# Altium PCB LM_001_Rev_F.PcbDoc (part 1 of 2)
Units mm, origin at the board's own origin, x right, y up, seen from the top; angles counter-clockwise.
Board outline 67 x 180 mm, 4 copper layers (Top Layer, +5V, Signal Layer 1, Bottom Layer), stack 0.778 mm thick; 116 components, 101 nets, 360 pads, 22 vias.
Unrouted connection lines stored in the file: 51.
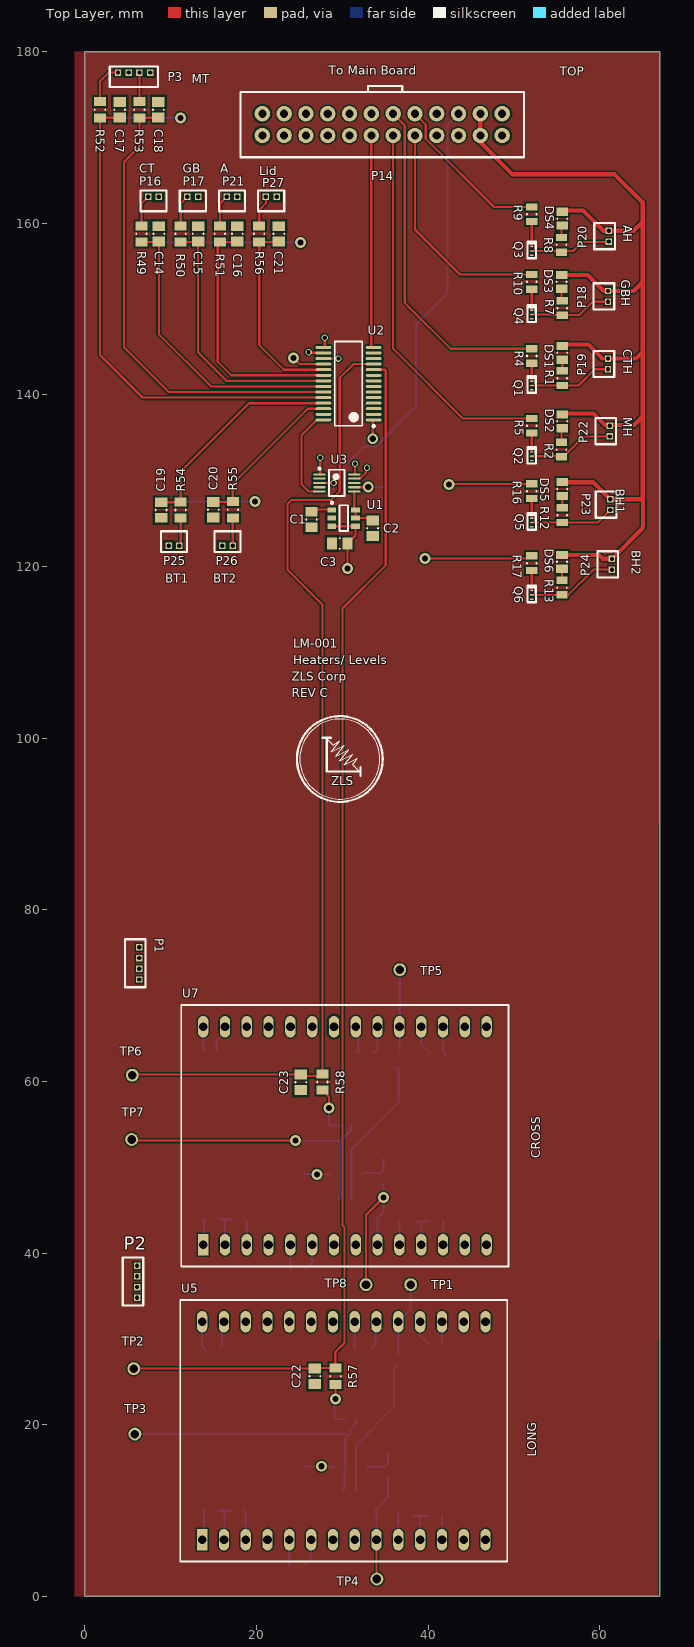
[diagram p0: Top Layer view]
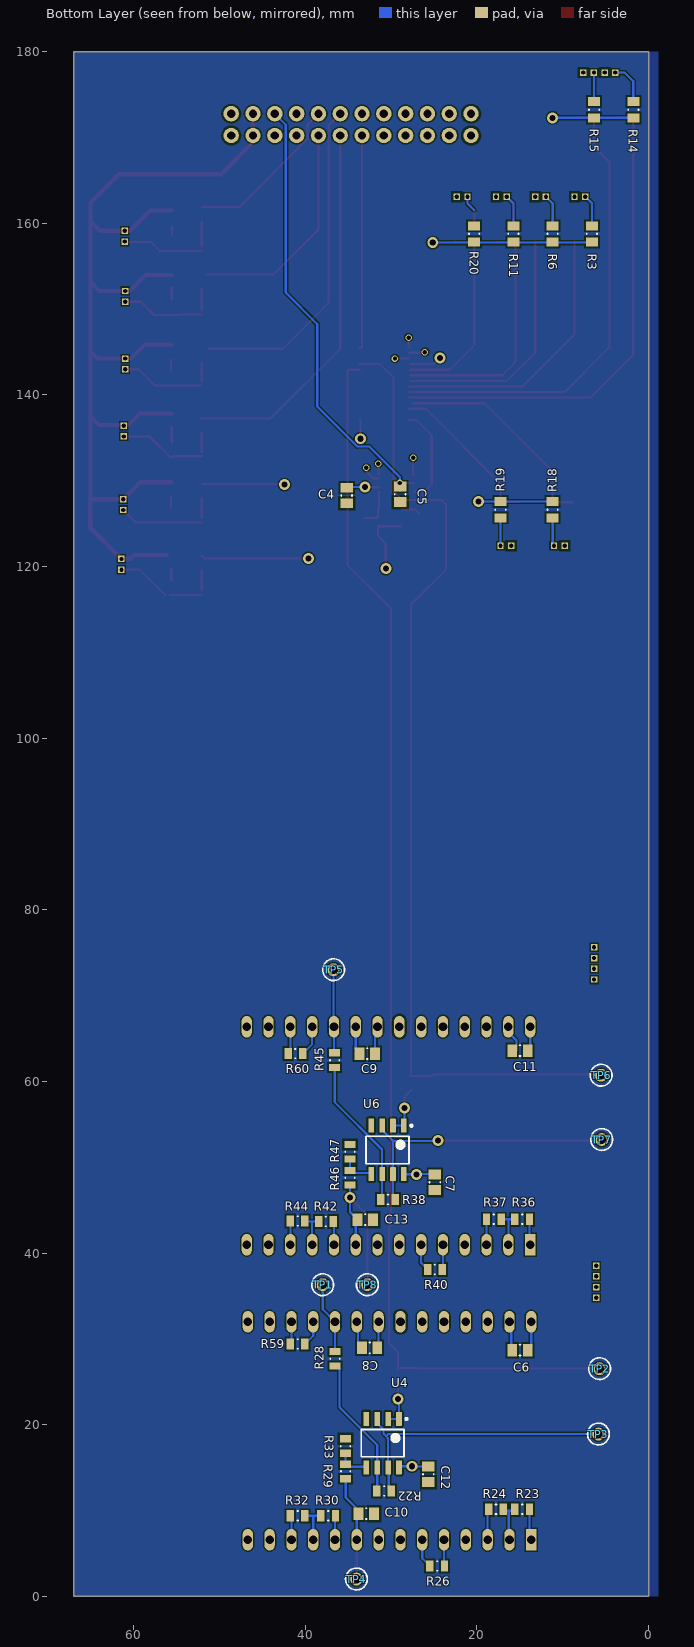
[diagram p1: Bottom Layer view, seen from below]
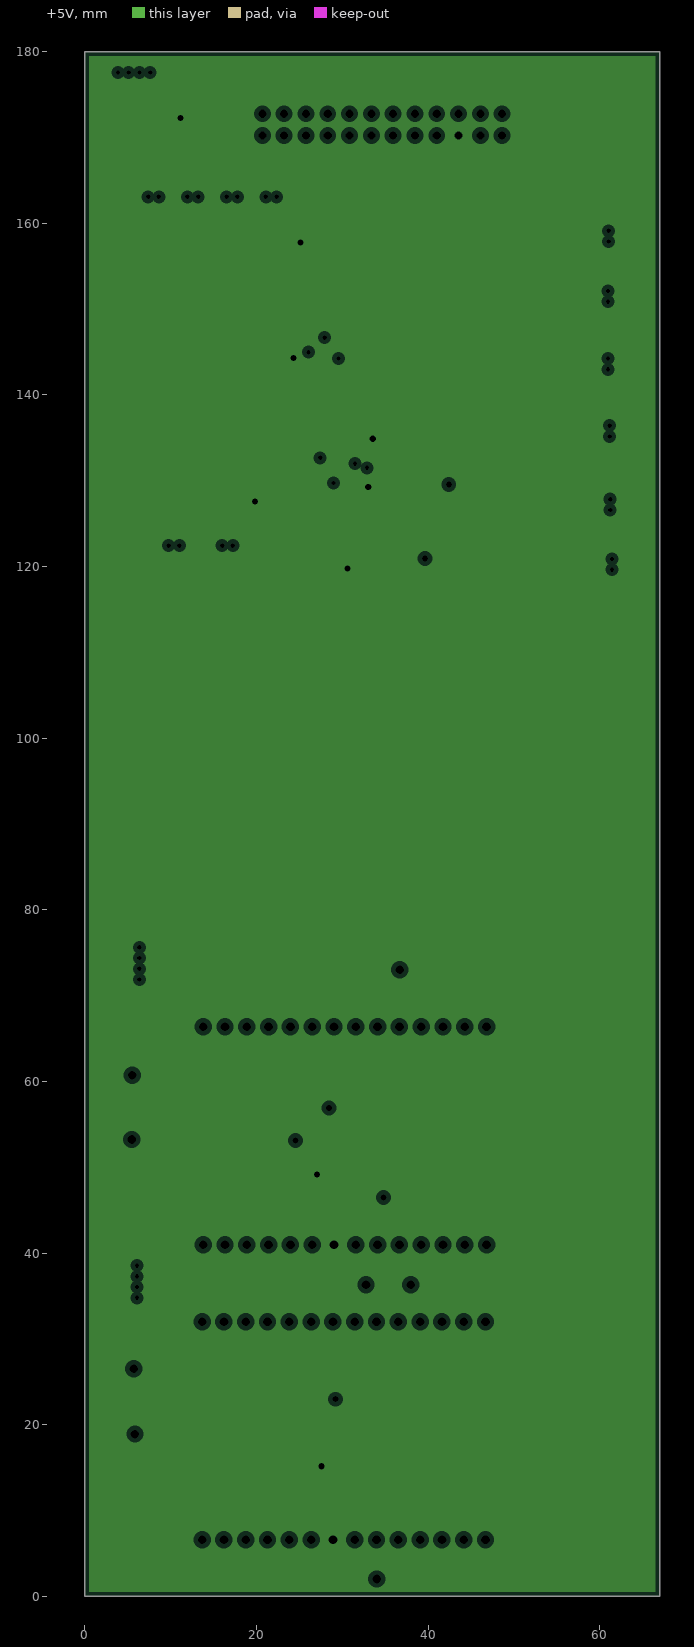
[diagram p2: +5V, clearances drawn from the general rule]
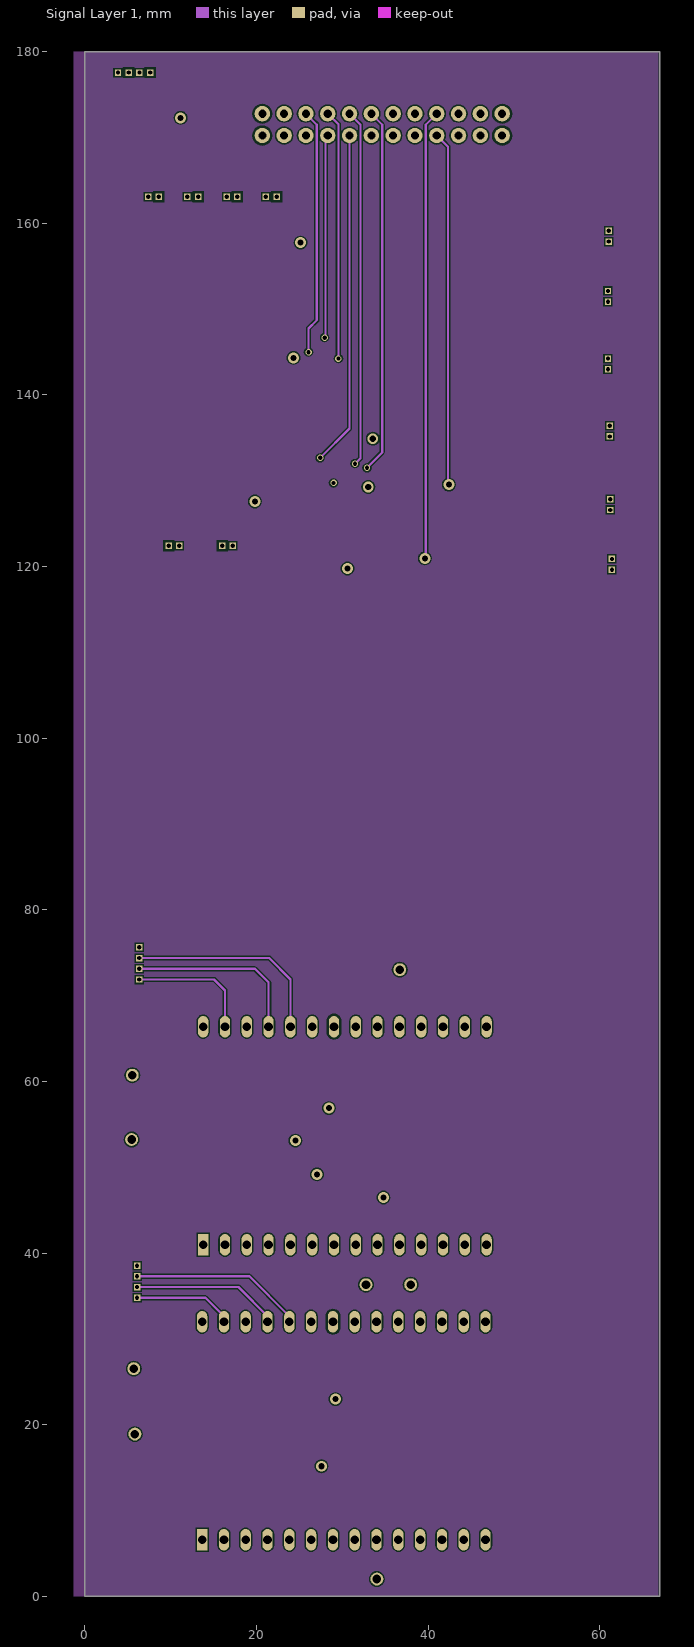
[diagram p3: Signal Layer 1]

## Layer stack, top to bottom
Top Solder: solder mask 0.0102, Solder Resist, Dk 3.5
Top Layer: signal copper 0.0356
Dielectric 1: core 0.254, FR-4, Dk 4.2
+5V: plane copper 0.036, net +5
Dielectric 4: prepreg 0.127, Dk 4.2
Signal Layer 1: signal copper 0.036
Dielectric 3: core 0.254, Dk 4.2
Bottom Layer: signal copper 0.0356
Bottom Solder: solder mask 0.0102, Solder Resist, Dk 3.5

## Board outline
0,180 67,180 67,0 0,0

## Design rules (kind name [scope] priority, off if disabled: settings)
Clearance [All] p1: gap=0.15 ignorepadtopadclearanceinfootprint=FALSE except(0.2: SMDPad-Fill SMDPad-Poly SMDPad-Region)
ComponentClearance [All] p1: gap=0 collisioncheckmode=3 verticalgap=0.254 showdistances=TRUE
MinimumSolderMaskSliver [All] p1: minsoldermaskwidth=0.045
PlaneClearance [All] p1: clearance=0.508
PlaneConnect [All] p1: planeconnectstyle=Relief reliefexpansion=0.508 reliefentries=4 reliefconductorwidth=0.254 reliefairgap=0.254
PolygonConnect [All] p1: connectstyle=Relief reliefconductorwidth=0.254 reliefentries=4 polygonreliefangle="90 Angle" airgapwidth=0.254
RoutingVias [All] p1: holewidth=0.711 width=1.27 viastyle="Through Hole" minholewidth=0.711 minwidth=1.27 maxholewidth=0.711 maxwidth=1.27
SilkToSilkClearance [All] p1: silktosilkclearance=0.127
SilkToSolderMaskClearance [IsPad] p1: minsilkscreentomaskgap=0.127 clearancetoexposedcopper=TRUE
SolderMaskExpansion [All] p1: expansion=0.2
Width [All] p1: maxlimit=0.762 minlimit=0.254 preferedwidth=0.254
24 further rules are at their usual default settings.

## Classes and differential pairs
component class Signal_Conditioner: C6 C7 C8 C9 C10 C11 C12 C13 C22 C23 R22 R23 R24 R26 R28 R29 R30 R32 R33 R36 R37 R38 R40 R42 R44 R45 R46 R47 R48 R57 R58 R59 R60 TP1 TP2 TP3 TP4 TP5 TP6 TP7 TP8 U4 U5 U6 U7
component class LM_001: C1 C2 C3 C4 C5 C14 C15 C16 C17 C18 C19 C20 C21 DS1 DS2 DS3 DS4 DS5 DS6 P1 P2 P3 P14 P16 P17 P18 P19 P20 P21 P22 P23 P24 P25 P26 P27 Q1 Q2 Q3 Q4 Q5 Q6 R1 R2 R3 R4 R5 R6 R7 R8 R9 R10 R11 R12 R13 R14 R15 R16 R17 R18 R19 R20 R49 R50 R51 R52 R53 R54 R55 R56 U1 U2 U3

## Components (designator, comment, footprint, x,y, rotation, side; value= is the part's Value field where it differs from the comment)
C1 "CAP CER 0.1UF 25V X7R 0805" CAPC0805(2012)145_N 26.416,125.476 r90 top
C2 "CAP CER 0.1UF 25V X7R 0805" CAPC0805(2012)145_N 33.528,124.46 r270 top
C3 "CAP CER 0.1UF 25V X7R 0805" CAPC0805(2012)145_N 29.718,122.682 r180 top
C4 "CAP CER 0.1UF 25V X7R 0805" CAPC0805(2012)145_N 35.179,128.27 r270 bottom
C5 "CAP CER 0.1UF 25V X7R 0805" CAPC0805(2012)145_N 28.951,128.403 r270 bottom
C6 "22uF" CAPC0805(2012)145_N 14.986,28.702 r0 bottom
C7 "CAP CER 0.1UF 25V X7R 0805" CAPC0805(2012)145_N 24.892,48.26 r270 bottom
C8 "CAP CER 0.1UF 25V X7R 0805" CAPC0805(2012)145_N 32.512,28.956 r0 bottom
C9 "CAP CER 0.1UF 25V X7R 0805" CAPC0805(2012)145_N 32.766,63.246 r0 bottom
C10 "22uF" CAPC0805(2012)145_N 32.901,9.652 r180 bottom
C11 "22uF" CAPC0805(2012)145_N 14.986,63.583 r0 bottom
C12 "CAP CER 0.1UF 25V X7R 0805" CAPC0805(2012)145_N 25.654,14.224 r270 bottom
C13 "22uF" CAPC0805(2012)145_N 33.007,43.901 r180 bottom
C14 "10uF" CAPC0805(2012)145_N 8.636,158.75 r90 top
C15 "10uF" CAPC0805(2012)145_N 13.208,158.75 r90 top
C16 "10uF" CAPC0805(2012)145_N 17.78,158.75 r90 top
C17 "10uF" CAPC0805(2012)145_N 4.064,173.228 r90 top
C18 "10uF" CAPC0805(2012)145_N 8.586,173.228 r90 top
C19 "10uF" CAPC0805(2012)145_N 8.89,126.586 r270 top
C20 "10uF" CAPC0805(2012)145_N 14.986,126.63 r270 top
C21 "10uF" CAPC0805(2012)145_N 22.606,158.75 r90 top
C22 "10uF" CAPC0805(2012)145_N 26.797,25.654 r270 top
C23 "10uF" CAPC0805(2012)145_N 25.171,59.919 r270 top
DS1 "LTST-S220KRKT" 0805C_L 55.626,144.882 r270 top
DS2 "LTST-S220KRKT" 0805C_L 55.626,136.906 r270 top
DS3 "LTST-S220KRKT" 0805C_L 55.552,153.162 r270 top
DS4 "LTST-S220KRKT" 0805C_L 55.626,160.528 r270 top
DS5 "LTST-S220KRKT" 0805C_L 55.626,129.032 r270 top
DS6 "LTST-S220KRKT" 0805C_L 55.606,120.544 r270 top
P1 "0530470410" 0530470410 6.35,71.882 r90 top
P2 "0530470410" 0530470410 6.096,34.798 r90 top
P3 "0530470410" 0530470410 7.62,177.546 r180 top
P14 "IPL1-112-01-L-D-K" IPL1-112-01-F-S-K 34.658,171.486 r0 top locked
P16 "0530470210" 0530470210 8.636,163.068 r180 top
P17 "0530470210" 0530470210 13.208,163.068 r180 top
P18 "0530470210" 0530470210 60.96,150.851 r90 top
P19 "0530470210" 0530470210 60.961,142.977 r90 top
P20 "0530470210" 0530470210 61.037,157.861 r90 top
P21 "0530470210" 0530470210 17.78,163.068 r180 top
P22 "0530470210" 0530470210 61.163,135.153 r90 top
P23 "0530470210" 0530470210 61.214,126.586 r90 top
P24 "0530470210" 0530470210 61.417,119.634 r90 top
P25 "0530470210" 0530470210 9.772,122.428 r0 top
P26 "0530470210" 0530470210 16.002,122.428 r0 top
P27 "0530470210" 0530470210 22.352,163.068 r180 top
Q1 "CSD17585F5T" CSD17585F5T 52.07,141.098 r0 top
Q2 "CSD17585F5T" CSD17585F5T 52.071,132.842 r0 top
Q3 "CSD17585F5T" CSD17585F5T 52.07,156.772 r0 top
Q4 "CSD17585F5T" CSD17585F5T 52.07,149.352 r0 top
Q5 "CSD17585F5T" CSD17585F5T 52.071,125.134 r0 top
Q6 "CSD17585F5T" CSD17585F5T 52.07,116.694 r0 top
R1 "4.99K" RESC0805(2012)_L 55.626,141.95 r90 top
R2 "4.99K" RESC0805(2012)_L 55.552,133.626 r90 top
R3 "6.98K" RESC0805(2012)_N 6.604,158.75 r270 bottom
R4 "75" RESC0805(2012)_L 52.07,144.526 r270 top
R5 "75" RESC0805(2012)_L 52.07,136.398 r270 top
R6 "6.98K" RESC0805(2012)_N 11.176,158.75 r270 bottom
R7 "4.99K" RESC0805(2012)_L 55.626,150.114 r90 top
R8 "4.99K" RESC0805(2012)_L 55.552,157.48 r90 top
R9 "75" RESC0805(2012)_L 52.07,161.036 r270 top
R10 "75" RESC0805(2012)_L 52.07,153.162 r270 top
R11 "6.98K" RESC0805(2012)_N 15.748,158.75 r270 bottom
R12 "4.99K" RESC0805(2012)_L 55.626,125.984 r90 top
R13 "4.99K" RESC0805(2012)_L 55.606,117.544 r90 top
R14 "6.98K" RESC0805(2012)_N 1.778,173.228 r270 bottom
R15 "6.98K" RESC0805(2012)_N 6.35,173.228 r270 bottom
R16 "75" RESC0805(2012)_L 52.071,128.778 r270 top
R17 "75" RESC0805(2012)_L 52.071,120.396 r270 top
R18 "6.98K" RESC0805(2012)_N 11.176,126.63 r90 bottom
R19 "6.98K" RESC0805(2012)_N 17.252,126.63 r90 bottom
R20 "6.98K" RESC0805(2012)_N 20.32,158.75 r270 bottom
R22 "25K" RESC0805(2012)_L 30.823,12.278 r180 bottom
R23 "1K" RESC0805(2012)_L 14.732,10.16 r180 bottom
R24 "10k" RESC0805(2012)_L 17.78,10.16 r0 bottom
R26 "50k" RESC0805(2012)_L 24.638,3.556 r180 bottom
R28 "10K" RESC0805(2012)_L 36.538,27.696 r270 bottom
R29 "1.21k" RESC0805(2012)_L 35.293,14.564 r270 bottom
R30 "250k" RESC0805(2012)_L 37.338,9.398 r180 bottom
R32 "DNP" RESC0805(2012)_L 40.894,9.398 r0 bottom
R33 "10K" RESC0805(2012)_L 35.306,17.526 r270 bottom
R36 "1K" RESC0805(2012)_L 14.732,43.942 r180 bottom
R37 "10k" RESC0805(2012)_L 18.034,43.942 r0 bottom
R38 "25K" RESC0805(2012)_L 30.366,46.238 r180 bottom
R40 "50k" RESC0805(2012)_L 24.892,38.1 r180 bottom
R42 "250k" RESC0805(2012)_L 37.592,43.688 r180 bottom
R44 "250k" RESC0805(2012)_L 40.894,43.754 r0 bottom
R45 "10k" RESC0805(2012)_L 36.576,62.484 r270 bottom
R46 "1.21k" RESC0805(2012)_L 34.785,48.778 r270 bottom
R47 "10K" RESC0805(2012)_L 34.798,51.816 r270 bottom
R49 "1.6K" RESC0805(2012)_N 6.598,158.75 r270 top
R50 "1.6K" RESC0805(2012)_N 11.176,158.75 r270 top
R51 "1.6K" RESC0805(2012)_N 15.748,158.75 r270 top
R52 "1.6K" RESC0805(2012)_N 1.778,173.228 r270 top
R53 "1.6K" RESC0805(2012)_N 6.37,173.228 r270 top
R54 "1.6K" RESC0805(2012)_N 11.176,126.586 r90 top
R55 "1.6K" RESC0805(2012)_N 17.252,126.63 r90 top
R56 "1.6K" RESC0805(2012)_N 20.32,158.75 r270 top
R57 "1.6K" RESC0805(2012)_N 29.21,25.654 r270 top
R58 "1.6K" RESC0805(2012)_N 27.686,59.944 r270 top
R59 "100k" RESC0805(2012)_L 40.894,29.404 r180 bottom
R60 "100k" RESC0805(2012)_L 41.148,63.246 r180 bottom
TP1 "DNP" KSTN-5003 37.973,36.322 r180 bottom
TP2 "DNP" KSTN-5003 5.715,26.543 r180 bottom
TP3 "DNP" KSTN-5003 5.842,18.923 r180 bottom
TP4 "DNP" KSTN-5003 34.036,2.032 r180 bottom
TP5 "DNP" KSTN-5003 36.703,73.025 r180 bottom
TP6 "DNP" KSTN-5003 5.537,60.731 r180 bottom
TP7 "DNP" KSTN-5003 5.461,53.238 r180 bottom
TP8 "DNP" KSTN-5003 32.766,36.322 r180 bottom
U1 "MAX6070AAUT41+T" SOT95P280X445-6N 30.168,125.636 r0 top
U2 "ADG1606BRUZ-REEL7" ADI-RU-28_M 30.734,141.307 r180 top
U3 "MAX11100EUB+T" U10+2_L 29.368,129.736 r0 top
U4 "LPC662AIM" D0008A_M 30.988,17.863 r270 bottom
U5 "SA40012" SA40012 13.673,6.609 r90 top
U6 "LPC662AIM" D0008A_M 30.417,52.029 r270 bottom
U7 "SA40012" SA40012 13.798,40.984 r90 top

## Footprints (in the part's own frame and the unit in brackets; to place one, negate y for a bottom-side part, rotate by r counter-clockwise, add the part's x,y. Pads: shape width x height; smd on the part's side, far side on the other; paste and mask are expansions set on the pad)
0805C_L [mm]
  rect 0.95x1.35 smd: 1(-0.8,0) 2(0.8,0)
  silkscreen extent -0.05,-0.58 0.05,0.58, body extent -1.1,-0.72 1.1,0.72, height 0.75
0530470210 [mm] "CONN HEADER VERT 2POS 1.25MM"
  rect 0.75x0.75 hole 0.5: 1(0,0) 2(1.25,0)
  silkscreen extent -0.9,-0.73 2.15,1.68
0530470410 [mm] "CONN HEADER VERT 4POS 1.25MM"
  rect 0.75x0.75 hole 0.5: 1(0,0) 2(1.25,0) 3(2.5,0) 4(3.75,0)
  silkscreen extent -0.9,-0.73 4.7,1.68
ADI-RU-28_M [mm] "SOP, 28-Leads, Body 9.7x4.4mm, Pitch 0.65mm, IPC Low Density"
  oval 1.85x0.35 smd: 1(-2.925,4.225) 2(-2.925,3.575) 3(-2.925,2.925) 4(-2.925,2.275) 5(-2.925,1.625) 6(-2.925,0.975) 7(-2.925,0.325) 8(-2.925,-0.325) 9(-2.925,-0.975) 10(-2.925,-1.625) 11(-2.925,-2.275) 12(-2.925,-2.925) 13(-2.925,-3.575) 14(-2.925,-4.225) 15(2.925,-4.225) 16(2.925,-3.575) 17(2.925,-2.925) 18(2.925,-2.275) 19(2.925,-1.625) 20(2.925,-0.975) 21(2.925,-0.325) 22(2.925,0.325) 23(2.925,0.975) 24(2.925,1.625) 25(2.925,2.275) 26(2.925,2.925) 27(2.925,3.575) 28(2.925,4.225)
  silkscreen extent -3.05,-4.9 1.6,5.07, body extent -2.25,-4.9 2.25,4.9, height 1.2
CAPC0805(2012)145_N [mm] "Chip Capacitor, Body 2.0x1.2mm, Height 1.45mm, IPC Medium Density"
  rect 1.15x1.45 smd: 1(-0.9,0) 2(0.9,0)
  silkscreen extent -0.05,-0.62 0.05,0.62, body extent -1.1,-0.72 1.1,0.73, height 1.45
CSD17585F5T [mm] "MOSFET N-CH 30V 5.9A PICOSTAR"
  rect 0.39x0.15 smd: 1(0,0.5) 2(0,0) 3(0,-0.5)
  silkscreen extent -0.5,-0.85 0.5,1.1, body extent -0.63,-0.98 0.6,0.98, height 0.35
D0008A_M [mm] "SOIC, 8-Leads, Body 5x4mm, Pitch 1.27mm, IPC Low Density"
  rrect15% 1.65x0.65 smd: 1(-2.825,1.905) 2(-2.825,0.635) 3(-2.825,-0.635) 4(-2.825,-1.905) 5(2.825,-1.905) 6(2.825,-0.635) 7(2.825,0.635) 8(2.825,1.905)
  silkscreen extent -2.95,-2.5 1.6,2.9, body extent -3,-2.45 3,2.45, height 1.63
IPL1-112-01-F-S-K [mm]
  round 1.8 hole 0.95: 1(-13.97,-1.27) 2(-13.97,1.27) 3(-11.43,-1.27) 4(-11.43,1.27) 5(-8.89,-1.27) 6(-8.89,1.27) 7(-6.35,-1.27) 8(-6.35,1.27) 9(-3.81,-1.27) 10(-3.81,1.27) 11(-1.27,-1.27) 12(-1.27,1.27) 13(1.27,-1.27) 14(1.27,1.27) 15(3.81,-1.27) 16(3.81,1.27) 17(6.35,-1.27) 18(6.35,1.27) 19(8.89,-1.27) 20(8.89,1.27) 21(11.43,-1.27) 22(11.43,1.27) 23(13.97,-1.27) 24(13.97,1.27)
  silkscreen extent -16.51,-3.81 16.51,3.81, body extent -15.95,-4.32 16.05,3.56, height 8.13
KSTN-5003 [mm] "Test Point, Through Hole, Dia 2.54mm"
  round 1.5 hole 1: 1(0,0)
  silkscreen extent -1.27,-1.27 1.27,1.27, body extent -1.27,-1.27 1.27,1.27, height 4.57
RESC0805(2012)_L [mm] "Chip Resistor, Body 2.0x1.3mm, IPC High Density"
  rect 0.85x1.3 smd: 1(-0.85,0) 2(0.85,0)
  silkscreen extent -0.05,-0.55 0.05,0.55, body extent -1.1,-0.67 1.1,0.68, height 0.7
RESC0805(2012)_N [mm] "Chip Resistor, Body 2.0x1.3mm, IPC Medium Density"
  rect 1.05x1.4 smd: 1(-0.95,0) 2(0.95,0)
  silkscreen extent -0.05,-0.6 0.05,0.6, body extent -1.1,-0.67 1.1,0.68, height 0.7
SA40012 [mm]
  rect 2.5x1.2 hole 1.016: 1(0,0)
  oval 2.5x1.2 hole 1.016: 2(0,-2.54) 3(0,-5.08) 4(0,-7.62) 5(0,-10.16) 6(0,-12.7) 7(0,-15.24) 8(0,-17.78) 9(0,-20.32) 10(0,-22.86) 11(0,-25.4) 12(0,-27.94) 13(0,-30.48) 14(0,-33.02) 15(25.4,-33.02) 16(25.4,-30.48) 17(25.4,-27.94) 18(25.4,-25.4) 19(25.4,-22.86) 20(25.4,-20.32) 21(25.4,-17.78) 22(25.4,-15.24) 23(25.4,-12.7) 24(25.4,-10.16) 25(25.4,-7.62) 26(25.4,-5.08) 27(25.4,-2.54) 28(25.4,0)
  silkscreen extent -2.54,-35.56 27.94,2.54
SOT95P280X445-6N [mm] "SOT23, 6-Leads, Body 2.90x2.80mm, Pitch 0.95mm, IPC Medium Density"
  rect 1x0.6 smd: 1(-1.375,0.95) 2(-1.375,0) 3(-1.375,-0.95) 4(1.375,-0.95) 5(1.375,0) 6(1.375,0.95)
  silkscreen extent -1.5,-1.5 0.5,1.92, body extent -2.11,-1.78 2.11,1.73, height 1.08
U10+2_L [mm] "TSSOP, 10-Leads, Body 3x3mm, Pitch 0.5mm, IPC High Density"
  oval 1.45x0.25 smd: 1(-2.025,1) 2(-2.025,0.5) 3(-2.025,0) 4(-2.025,-0.5) 5(-2.025,-1) 6(2.025,-1) 7(2.025,-0.5) 8(2.025,0) 9(2.025,0.5) 10(2.025,1)
  silkscreen extent -2.15,-1.53 0.9,1.8, body extent -1.55,-1.55 1.55,1.55, height 1.1

## Part data
C1 C2 C3 C4 C5 C7 C8 C9 C12: library part CMP-1036-04795-1, Capacitance=0.1µF, Manufacturer="Murata Electronics North America", Manufacturer Part Number=GRM21BR71E104KA01L, Operating Temperature="-55°C ~ 125°C", Package / Case="0805 (2012 Metric)", Ratings=-, Supplier Part Number 1=490-1673-6-ND, Temperature Coefficient=X7R, Tolerance=±10%, Voltage - Rated=25V, Applications="General Purpose", Category=Capacitors, ComponentLink1Description=http://www.murata.com/~/media/webrenewal/support/library/catalog/products/capacitor/mlcc/c02e.ashx, ComponentLink1URL=http://www.murata.com/~/media/webrenewal/support/library/catalog/products/capacitor/mlcc/c02e.ashx, Features=-, Height - Seated (Max)=-, Lead Spacing=-, Lead Style=-, Mounting Type="Surface Mount, MLCC", Packaging=Digi-Reel®, Part Status=Active, Pricing 1="1=0.2, 10=0.145, 100=0.0683, 500=0.04788, 1000=0.03964 (USD)", RoHS="RoHS Compliant", Size / Dimension="0.079\" L x 0.049\" W (2.00mm x 1.25mm)", Stock 1=891652, Supplier 1=Digi-Key, Thickness (Max)="0.053\" (1.35mm)"
C6 C10 C11 C13: library part CMP-1036-04795-1, "CAP CER 22UF 16V X5R 0805", Manufacturer="Murata Electronics North America", Manufacturer Part Number=GRM219R61C226ME15L, Operating Temperature="-55°C ~ 85°C", Package / Case="0805 (2012 Metric)", Ratings=-, Supplier Part Number 1=490-9952-1-ND, Temperature Coefficient=X5R, Tolerance=±20%, Voltage - Rated=16V, Applications="General Purpose", Category=Capacitors, ComponentLink1Description=http://search.murata.co.jp/Ceramy/image/img/A01X/G101/ENG/GRM219R61C226ME15-01.pdf, ComponentLink1URL=http://search.murata.co.jp/Ceramy/image/img/A01X/G101/ENG/GRM219R61C226ME15-01.pdf, Features=-, Height - Seated (Max)=-, Lead Spacing=-, Lead Style=-, Mounting Type="Surface Mount, MLCC", Notification="Current market demand for these product types have resulted in fluctuating and extending lead times. Lead times may differ.", Packaging="Cut Tape (CT)", Part Status=Active, Pricing 1="1=0.51, 10=0.359, 100=0.2364, 500=0.1751, 1000=0.14884 (USD)", RoHS="RoHS Compliant", Size / Dimension="0.079\" L x 0.049\" W (2.00mm x 1.25mm)", Stock 1=200, Supplier 1=Digi-Key, Thickness (Max)="0.039\" (1.00mm)"
C14 C15 C16 C17 C18 C19 C20 C21 C22 C23: library part CMP-1036-04795-1, "CAP CER 10UF 16V X6S 0805", Manufacturer="TDK Corporation", Manufacturer Part Number=C2012X6S1C106K085AC, Operating Temperature="-55°C ~ 105°C", Package / Case="0805 (2012 Metric)", Ratings=-, Supplier Part Number 1=445-14483-6-ND, Temperature Coefficient=X6S, Tolerance=±10%, Voltage - Rated=16V, Applications="General Purpose", Category=Capacitors, ComponentLink1Description=https://product.tdk.com/info/en/catalog/datasheets/mlcc_commercial_general_en.pdf, ComponentLink1URL=https://product.tdk.com/info/en/catalog/datasheets/mlcc_commercial_general_en.pdf, Failure Rate=-, Features="Low ESL", Height - Seated (Max)=-, Lead Spacing=-, Lead Style=-, Mounting Type="Surface Mount, MLCC", Notification="Current market demand for these product types have resulted in fluctuating and extending lead times. Lead times may differ.", Packaging=Digi-Reel®, Part Status=Active, Pricing 1="1=0.38, 10=0.259, 100=0.1466, 500=0.1035, 1000=0.09056 (USD)", RoHS="RoHS Compliant", Size / Dimension="0.079\" L x 0.049\" W (2.00mm x 1.25mm)", Stock 1=0, Supplier 1=Digi-Key, Thickness (Max)="0.039\" (1.00mm)"
DS1 DS2 DS3 DS4 DS5 DS6: library part "LED A/K", "LED RED CLEAR CHIP SMD R/A", Case/Package=0805, Case Code (Metric)=2012, Colour=Red, Forward Current=20mA, Forward Voltage=2V, Lens Colour=Colorless, Manufacturer="Vishay / Lite-On", Max Operating Temperature=85°C, Min Operating Temperature=-55°C, Package Quantity=4000, Power Dissipation=75mW, Supplier Part Number 1=160-1469-1-ND, Case Code (Imperial)=0805, ComponentLink1Description=https://datasheet.ciiva.com/2110/s-110-ltst-s220krkt-2110132.pdf, ComponentLink1URL=https://datasheet.ciiva.com/2110/s-110-ltst-s220krkt-2110132.pdf, ComponentLink2Description=https://datasheet.ciiva.com/2110/s-110-ltst-s220krkt-2110133.pdf, ComponentLink2URL=https://datasheet.ciiva.com/2110/s-110-ltst-s220krkt-2110133.pdf, ComponentLink3Description=https://datasheet.ciiva.com/2110/s-110-ltst-s220krkt-2110134.pdf, ComponentLink3URL=https://datasheet.ciiva.com/2110/s-110-ltst-s220krkt-2110134.pdf, ComponentLink4Description=https://datasheet.ciiva.com/12403/lite-on-ltst-s220krkt-187389-12403798.pdf, ComponentLink4URL=https://datasheet.ciiva.com/12403/lite-on-ltst-s220krkt-187389-12403798.pdf, ComponentLink5Description=https://datasheet.ciiva.com/16345/lite-onltst-s220krkt-16345511.pdf, ComponentLink5URL=https://datasheet.ciiva.com/16345/lite-onltst-s220krkt-16345511.pdf, ComponentLink6Description=https://datasheet.ciiva.com/15118/getdatasheetpartid-225752-15118120.pdf, ComponentLink6URL=https://datasheet.ciiva.com/15118/getdatasheetpartid-225752-15118120.pdf, ComponentLink7Description=https://datasheet.ciiva.com/14633/0900766b80dc0b76-14633737.pdf, ComponentLink7URL=https://datasheet.ciiva.com/14633/0900766b80dc0b76-14633737.pdf, ComponentLink8Description=https://datasheet.ciiva.com/11775/0900766b80dc0b76-11775439.pdf, ComponentLink8URL=https://datasheet.ciiva.com/11775/0900766b80dc0b76-11775439.pdf, Depth=0.6mm, Dominant Wavelength=631nm, Height=0.6mm, Illumination Colour=Red, Lead Free="Lead Free", Length=2.1mm, Lens Style=Diffused,Colorless, Lens Transparency=Clear, Luminous Intensity=54mcd, Manufacturer Part Number=LTST-S220KRKT, Mount="Surface Mount", Number of Elements=1, Number of LEDs=1, Number of Pins=2, Packaging="Tape and Reel", Power Rating=75mW, Pricing 1="1=0.31, 10=0.225, 25=0.1656, 100=0.1183, 250=0.0804, 500=0.071, 1000=0.0556 (USD)", Radiation Hardening=No, Stock 1=108191, Supplier 1=Digi-Key, Test Current=20mA, Viewing Angle=130°, Wavelength=639nm, Width=1mm
P1 P2 P3: "CONN HEADER VERT 4POS 1.25MM", Color=Natural, Contact Resistance=20mR, Housing Color=White, Manufacturer=Molex, Max Operating Temperature=85°C, Max Voltage Rating (AC)=125V, Min Operating Temperature=-40°C, Supplier Part Number 1=WM1733-ND, ComponentLink1Description=http://components.arrow.com/part/dataview/2938462S4237926N3303?src-supplier=Arrow, ComponentLink1URL=http://components.arrow.com/part/dataview/2938462S4237926N3303?src-supplier=Arrow, Connector Type="Blade Pin", Contact Material=Bronze, Contact Mating Length=0.089inch, Contact Plating=Tin, Depth=3.2mm, Housing Material=Nylon, Length=6.75mm, Manufacturer Part Number=0530470410, Mount="Through Hole", Number of Contacts=4, Number of Positions=4, Number of Rows=1, Orientation=Straight, Packaging=Tray, Pitch=1.25mm, Pricing 1="1=0.28, 10=0.261, 100=0.183, 500=0.15688, 1000=0.13073, 5000=0.11205, 10000=0.10458 (USD)", Stock 1=21727, Supplier 1=Digi-Key, Termination=Solder
P14: library part IPL1-112-01-F-S-K, Current Rating=-, Insulation Color=Natural, Manufacturer="Samtec Inc.", Material Flammability Rating="UL94 V-0", Operating Temperature="-55°C ~ 125°C", Supplier Part Number 1=SAM10587-ND, Voltage Rating="675VAC, 954VDC", Applications=-, Category="Connectors, Interconnects", ComponentLink1Description=http://suddendocs.samtec.com/prints/ipl1-1xx-xx-xxx-d-xx-x-xx-mkt.pdf, ComponentLink1URL=http://suddendocs.samtec.com/prints/ipl1-1xx-xx-xxx-d-xx-x-xx-mkt.pdf, Connector Type=Header, Contact Finish - Mating=Gold, Contact Finish - Post=Tin, Contact Finish Thickness - Mating="10.0µin (0.25µm)", Contact Finish Thickness - Post=-, Contact Length - Mating="0.215\" (5.46mm)", Contact Length - Post="0.120\" (3.05mm)", Contact Material="Phosphor Bronze", Contact Shape=Square, Contact Type="Male Pin", Fastening Type="Locking Ramp", Features=-, Ingress Protection=-, Insulation Height="0.320\" (8.13mm)", Insulation Material="Liquid Crystal Polymer (LCP)", Manufacturer Part Number=IPL1-112-01-L-D-K, Mated Stacking Heights=-, Mounting Type="Through Hole", Number of Positions=24, Number of Positions Loaded=All, Number of Rows=2, Overall Contact Length=-, Packaging=Tube, Part Status=Active, Pitch - Mating="0.100\" (2.54mm)", Pricing 1="1=3.8, 18=3.64778, 108=3.04, 504=2.58401, 1008=2.204, 5004=1.976 (USD)", RoHS="RoHS Compliant", Row Spacing - Mating="0.100\" (2.54mm)", Shrouding="Shrouded - 4 Wall", Stock 1=142, Style="Board to Cable/Wire", Supplier 1=Digi-Key, Termination=Solder
P16 P17 P18 P19 P20 P21 P22 P23 P24 P25 P26 P27: "CONN HEADER VERT 2POS 1.25MM", Color=Natural, Contact Resistance=20mR, Housing Color=Beige, Manufacturer=Molex, Max Operating Temperature=85°C, Min Operating Temperature=-40°C, Supplier Part Number 1=WM1731-ND, ComponentLink1Description=http://components.arrow.com/part/dataview/2938464S3509005N3303?src-supplier=Arrow, ComponentLink1URL=http://components.arrow.com/part/dataview/2938464S3509005N3303?src-supplier=Arrow, ComponentLink2Description=https://www.molex.com/pdm_docs/sd/530470210_sd.pdf?src-supplier=Digi-Key, ComponentLink2URL=https://www.molex.com/pdm_docs/sd/530470210_sd.pdf?src-supplier=Digi-Key, Connector Type="Blade Pin", Contact Material=Bronze, Contact Mating Length=0.089inch, Contact Plating=Tin, Depth=3.2mm, Housing Material=Nylon, Length=4.25mm, Manufacturer Part Number=0530470210, Mount="Through Hole", Number of Contacts=2, Number of Positions=2, Number of Rows=1, Orientation=Straight, Packaging=Tray, Pitch=1.25mm, Pricing 1="1=0.19, 10=0.177, 100=0.1227, 500=0.10384, 1000=0.08496, 5000=0.07552, 10000=0.06844 (USD)", Stock 1=100609, Supplier 1=Digi-Key, Termination=Solder
Q1 Q2 Q3 Q4 Q5 Q6: "MOSFET N-CH 30V 5.9A PICOSTAR", Supplier Part Number 1=296-45068-6-ND, Supplier 1=Digi-Key
R1 R2 R7 R8 R12 R13: library part CMP-1013-00393-1, "RES SMD 4.99K OHM 1% 1/8W 0805", Manufacturer="Vishay Dale", Manufacturer Part Number=CRCW08054K99FKEA, Operating Temperature="-55°C ~ 155°C", Package / Case="0805 (2012 Metric)", Power (Watts)="0.125W, 1/8W", Resistance (Ohms)=4.99k, Supplier Device Package=0805, Supplier Part Number 1=541-4.99KCCT-ND, Temperature Coefficient=±100ppm/°C, Tolerance=±1%, Category=Resistors, ComponentLink1Description=http://www.vishay.com/docs/20035/dcrcwe3.pdf, ComponentLink1URL=http://www.vishay.com/docs/20035/dcrcwe3.pdf, Composition="Thick Film", Failure Rate=-, Features="Automotive AEC-Q200", Height - Seated (Max)="0.020\" (0.50mm)", Packaging="Cut Tape (CT)", Part Status=Active, Pricing 1="1=0.1, 10=0.044, 100=0.0178, 1000=0.00802, 2500=0.00696 (USD)", RoHS="RoHS Compliant", Size / Dimension="0.079\" L x 0.049\" W (2.00mm x 1.25mm)", Stock 1=93740, Supplier 1=Digi-Key
R3 R6 R11 R14 R15 R18 R19 R20: library part CMP-1013-00606-1, "RES SMD 6.98K OHM 1% 1/8W 0805", Manufacturer="Vishay Dale", Manufacturer Part Number=CRCW08056K98FKEA, Operating Temperature="-55°C ~ 155°C", Package / Case="0805 (2012 Metric)", Power (Watts)="0.125W, 1/8W", Supplier Device Package=0805, Supplier Part Number 1=541-6.98KCCT-ND, Temperature Coefficient=±100ppm/°C, Tolerance=±1%, Category=Resistors, ComponentLink1Description=http://www.vishay.com/docs/20035/dcrcwe3.pdf, ComponentLink1URL=http://www.vishay.com/docs/20035/dcrcwe3.pdf, Composition="Thick Film", Failure Rate=-, Features="Automotive AEC-Q200", Height - Seated (Max)="0.020\" (0.50mm)", Packaging="Cut Tape (CT)", Part Status=Active, Pricing 1="1=0.1, 10=0.055, 100=0.0223, 1000=0.01003, 2500=0.0087 (USD)", RoHS="RoHS Compliant", Size / Dimension="0.079\" L x 0.049\" W (2.00mm x 1.25mm)", Stock 1=573, Supplier 1=Digi-Key
R4 R5 R9 R10 R16 R17: library part CMP-1013-00393-1, "RES SMD 75 OHM 1% 1/8W 0805", Manufacturer="Vishay Dale", Manufacturer Part Number=CRCW080575R0FKTA, Operating Temperature="-55°C ~ 155°C", Package / Case="0805 (2012 Metric)", Power (Watts)="0.125W, 1/8W", Supplier Device Package=0805, Supplier Part Number 1=541-3031-1-ND, Temperature Coefficient=±100ppm/°C, Tolerance=±1%, Category=Resistors, ComponentLink1Description=http://www.vishay.com/docs/20008/dcrcw.pdf, ComponentLink1URL=http://www.vishay.com/docs/20008/dcrcw.pdf, Composition="Thick Film", Failure Rate=-, Features="Automotive AEC-Q200", Height - Seated (Max)="0.020\" (0.50mm)", Packaging="Cut Tape (CT)", Part Status=Active, Pricing 1="1=0.16, 10=0.142, 100=0.0546, 1000=0.02401, 2500=0.02073 (USD)", RoHS="RoHS non-compliant", Size / Dimension="0.079\" L x 0.049\" W (2.00mm x 1.25mm)", Stock 1=1088, Supplier 1=Digi-Key
R22 R38: library part CMP-1013-00393-1, "CRCW080510K0FKEA"
R23 R36: library part CMP-1013-00393-1, "RES SMD 1K OHM 1% 1/8W 0805", Manufacturer="Vishay Dale", Manufacturer Part Number=CRCW08051K00FKEA, Operating Temperature="-55°C ~ 155°C", Package / Case="0805 (2012 Metric)", Power (Watts)="0.125W, 1/8W", Supplier Device Package=0805, Supplier Part Number 1=541-1.00KCCT-ND, Temperature Coefficient=±100ppm/°C, Tolerance=±1%, Category=Resistors, ComponentLink1Description=http://www.vishay.com/docs/20035/dcrcwe3.pdf, ComponentLink1URL=http://www.vishay.com/docs/20035/dcrcwe3.pdf, Composition="Thick Film", Failure Rate=-, Features="Automotive AEC-Q200", Height - Seated (Max)="0.020\" (0.50mm)", Packaging="Cut Tape (CT)", Part Status=Active, Pricing 1="1=0.1, 10=0.055, 100=0.0223, 1000=0.01003, 2500=0.0087 (USD)", RoHS="RoHS Compliant", Size / Dimension="0.079\" L x 0.049\" W (2.00mm x 1.25mm)", Stock 1=157631, Supplier 1=Digi-Key
R24 R28 R33 R37 R45 R47: library part CMP-1013-00393-1, "RES SMD 10K OHM 1% 1/8W 0805", Manufacturer="Vishay Dale", Manufacturer Part Number=CRCW080510K0FKEA, Operating Temperature="-55°C ~ 155°C", Package / Case="0805 (2012 Metric)", Power (Watts)="0.125W, 1/8W", Supplier Device Package=0805, Supplier Part Number 1=541-10.0KCCT-ND, Temperature Coefficient=±100ppm/°C, Tolerance=±1%, Category=Resistors, ComponentLink1Description=http://www.vishay.com/docs/20035/dcrcwe3.pdf, ComponentLink1URL=http://www.vishay.com/docs/20035/dcrcwe3.pdf, Composition="Thick Film", Failure Rate=-, Features="Automotive AEC-Q200", Height - Seated (Max)="0.020\" (0.50mm)", Packaging="Cut Tape (CT)", Part Status=Active, Pricing 1="1=0.1, 10=0.055, 100=0.0223, 1000=0.01003, 2500=0.0087 (USD)", RoHS="RoHS Compliant", Size / Dimension="0.079\" L x 0.049\" W (2.00mm x 1.25mm)", Stock 1=1858038, Supplier 1=Digi-Key
R26 R40: library part CMP-1013-00393-1, "RES SMD 24.3K OHM 1% 1/8W 0805", Manufacturer="Vishay Dale", Manufacturer Part Number=CRCW080524K3FKEA, Operating Temperature="-55°C ~ 155°C", Package / Case="0805 (2012 Metric)", Power (Watts)="0.125W, 1/8W", Supplier Device Package=0805, Supplier Part Number 1=541-24.3KCCT-ND, Temperature Coefficient=±100ppm/°C, Tolerance=±1%, Category=Resistors, ComponentLink1Description=http://www.vishay.com/docs/20035/dcrcwe3.pdf, ComponentLink1URL=http://www.vishay.com/docs/20035/dcrcwe3.pdf, Composition="Thick Film", Failure Rate=-, Features="Automotive AEC-Q200", Height - Seated (Max)="0.020\" (0.50mm)", Packaging="Cut Tape (CT)", Part Status=Active, Pricing 1="1=0.1, 10=0.055, 100=0.0223, 1000=0.01003, 2500=0.0087 (USD)", RoHS="RoHS Compliant", Size / Dimension="0.079\" L x 0.049\" W (2.00mm x 1.25mm)", Stock 1=35, Supplier 1=Digi-Key
R29 R46: library part CMP-1013-00393-1, "RES SMD 1.21K OHM 1% 1/8W 0805", Manufacturer="Vishay Dale", Manufacturer Part Number=CRCW08051K21FKEA, Operating Temperature="-55°C ~ 155°C", Package / Case="0805 (2012 Metric)", Power (Watts)="0.125W, 1/8W", Supplier Device Package=0805, Supplier Part Number 1=541-1.21KCCT-ND, Temperature Coefficient=±100ppm/°C, Tolerance=±1%, Category=Resistors, ComponentLink1Description=http://www.vishay.com/docs/20035/dcrcwe3.pdf, ComponentLink1URL=http://www.vishay.com/docs/20035/dcrcwe3.pdf, Composition="Thick Film", Failure Rate=-, Features="Automotive AEC-Q200", Height - Seated (Max)="0.020\" (0.50mm)", Packaging="Cut Tape (CT)", Part Status=Active, Pricing 1="1=0.1, 10=0.055, 100=0.0223, 1000=0.01003, 2500=0.0087 (USD)", RoHS="RoHS Compliant", Size / Dimension="0.079\" L x 0.049\" W (2.00mm x 1.25mm)", Stock 1=93438, Supplier 1=Digi-Key
R30 R32 R42 R44: library part CMP-1013-00393-1, "RES SMD 249K OHM 1% 1/8W 0805", Manufacturer="Vishay Dale", Manufacturer Part Number=CRCW0805249KFKECC, Operating Temperature="-55°C ~ 155°C", Package / Case="0805 (2012 Metric)", Power (Watts)="0.125W, 1/8W", Supplier Device Package=0805, Supplier Part Number 1=541-4128-1-ND, Temperature Coefficient=±100ppm/°C, Tolerance=±1%, Category=Resistors, ComponentLink1Description=http://www.vishay.com/docs/28773/crcwce3.pdf, ComponentLink1URL=http://www.vishay.com/docs/28773/crcwce3.pdf, Composition="Thick Film", Failure Rate=-, Features=-, Height - Seated (Max)="0.024\" (0.60mm)", Packaging="Cut Tape (CT)", Part Status=Active, Pricing 1="1=0.1, 10=0.06, 100=0.0244, 1000=0.01094, 2500=0.0095, 5000=0.00785 (USD)", RoHS="RoHS Compliant", Size / Dimension="0.079\" L x 0.049\" W (2.00mm x 1.25mm)", Stock 1=19464, Supplier 1=Digi-Key
R49 R50 R51 R52 R53 R54 R55 R56 R57 R58: library part CMP-1013-00606-1, "RES SMD 1.6K OHM 1% 1/8W 0805"
R59 R60: library part CMP-1013-00393-1, "RES SMD 50K OHM 1% 1/8W 0805", Supplier Device Package=0805, Supplier Part Number 1=541-4128-1-ND, Temperature Coefficient=±100ppm/°C, Tolerance=±1%
TP1 TP2 TP3 TP4 TP5 TP6 TP7 TP8: library part CMP-1672-00009-1, "Test Point, Orange, 1-Pin THD, RoHS", Colour=Orange,White, Flammability Rating="UL94 V-0", Forward Current="3 A", Forward Voltage="1.08 V", Manufacturer="Keystone Electronics", Manufacturer Part Number=5003, Max Operating Temperature="150 degC", Max Surge Current="80 A", Min Operating Temperature="-65 degC", Package Quantity=500, Peak Reverse Current="600 uA", Supplier Part Number 1=1432640, Body Material=PBT, ComponentLink1Description="Manufacturer URL", ComponentLink1URL=http://www.keyelco.com/, ComponentLink2Description=Datasheet, ComponentLink2URL=http://keyelco.com/userAssets/file/M65p56.pdf, Contact Material=Bronze, Contact Plating=Silver,Tin, DatasheetVersion=Jun-15, Diameter="5.3 mm", Height="0.25 inch", Inside Diameter=1.27mm, Lead Free="Lead Free", Length="9.5 mm", Material=Bronze,Nylon,Silver, Mount="Through Hole", Number of Pins=1, Outside Diameter=2.54mm, PackageDescription="1-Pin Through Hole Device, Dia 2.54 mm", PackageReference=5003, Packaging=Bulk, Pins=2, Plating=Silver, Pricing 1="100=0.176, 500=0.148, 1000=0.146, 2000=0.143, 4000=0.141 (USD)", Radiation Hardening=No, REACH SVHC="No SVHC", RoHSCompliant=true, Stock 1=5752, Supplier 1="Future Electronics", Termination="Through Hole", Weight="0.01 lb", Width="0.25 inch"
U1: "IC VREF SERIES 4.096V SOT23", Current - Supply=350µA, Manufacturer="Maxim Integrated", Operating Temperature="-40°C ~ 125°C (TA)", Package / Case=SOT-23-6, Supplier Part Number 1=MAX6070AAUT41+TCT-ND, Temperature Coefficient=6ppm/°C, Tolerance=±0.04%, Voltage - Input="4.3 V ~ 5.5 V", Voltage - Output (Min/Fixed)=4.096V, Category="Integrated Circuits (ICs)", ComponentLink1Description=https://datasheets.maximintegrated.com/en/ds/MAX6070-MAX6071.pdf, ComponentLink1URL=https://datasheets.maximintegrated.com/en/ds/MAX6070-MAX6071.pdf, Manufacturer Part Number=MAX6070AAUT41+T, Mounting Type="Surface Mount", Noise - 0.1Hz to 10Hz=9.6µVp-p, Noise - 10Hz to 10kHz=9µVrms, Output Type=Fixed, Packaging="Cut Tape (CT)", Part Status=Active, Pricing 1="1=3.41, 10=3.213, 25=2.5704, 50=2.4418, 100=2.2491, 250=2.13344, 500=2.05634 (USD)", Reference Type=Series, RoHS="RoHS Compliant", Stock 1=2623, Supplier 1=Digi-Key, Supplier Device Package=SOT-23-6
U2: library part CMP-0793-00166-1, "4.5 Ohm Ron, 16-Channel, +/-5 V,+12 V,+5 V and +3.3 V Multiplexer, 28-pin SOP (RU-28), Reel", Manufacturer="Analog Devices", Bandwidth (Hz)="21M, 22M, 19M, 17M", Code_JEDEC=MO-153-AE, ComponentLink1Description="Manufacturer URL", ComponentLink1URL=http://www.analog.com/en/index.html, ComponentLink2Description=Datasheet, ComponentLink2URL=http://www.analog.com/static/imported-files/data_sheets/ADG1606_1607.pdf, ComponentLink3Description="Package Specification", ComponentLink3URL=http://www.analog.com/static/imported-files/packages/249854663RU_28.pdf, DatasheetVersion="Rev. 0", Max Analog Signal Range="Vss to Vdd", Mounting Technology="Surface Mount", PackageDescription="28-Pin Thin Shrink Small Outline Package, Body 9.7 x 4.4 mm, Pitch 0.65 mm", PackageReference=RU-28, PackageVersion=Mar-05, Packing=Reel, PartNumber=ADG1606BRUZ-REEL7, Ron (ohms)=4, t transition (s)=143n
U3: library part CMP-0249-00017-1, "16-Bit, +5V, 200ksps ADC with 10uA Shutdown, 10-Pin uMAX, -40°C to +85°C, Pb-Free, Tape and Reel", Code_JEDEC=MO-187-BA, ComponentLink1Description="Manufacturer URL", ComponentLink1URL=http://www.maxim-ic.com, ComponentLink2Description=Datasheet, ComponentLink2URL=http://datasheets.maxim-ic.com/en/ds/MAX11100.pdf, ComponentLink3Description="Package Specification", ComponentLink3URL=http://pdfserv.maxim-ic.com/package_dwgs/21-0061.PDF, DatasheetVersion="Rev 1, Jan-2012", PackageDescription="10-Pin Micro-MAX Thin Shrink Small Outline (uSOP), 3 x 3 x 0.85 mm Body, 0.5 mm Pitch, Pb-Free", PackageReference=U10+2, PackageVersion="revL, 2008"
U4: library part CMP-0055-00867-3, "Low Power CMOS Dual Operational Amplifier, 8-pin Narrow SOIC", Manufacturer="Texas Instruments", Package Reference=D0008A, PackageTopMarking=NSZXTT*LPC66*2AIM, PowerWise=N, Code_IPC=SOIC127P600-8, Code_JEDEC=MS-012-AA, ComponentLink1Description="Datasheet URL", ComponentLink1URL=http://www.ti.com/general/docs/lit/getliterature.tsp?genericPartNumber=LPC662&fileType=pdf, CompType=Amplifiers, PackageDescription="SOIC Narrow, 4.9 x 3.9 x 1.45mm, 8 Lead, 1.27mm Pitch", PartId=1, PinCount=8, RoHS=N
U5 U7: "Single Axix CMOS Signal Conditioning Module", Manufacturer=Spectron, Manufacturer Part Number=A40012
U6: library part CMP-0055-00867-3, "Low Power CMOS Dual Operational Amplifier, 8-pin Narrow SOIC", Base Part Number=LPC662, Current - Supply=86µA, Manufacturer="Texas Instruments", Manufacturer Part Number=LPC662AIMX/NOPB, Operating Temperature="-40°C ~ 85°C", Package / Case="8-SOIC (0.154\", 3.90mm Width)", Supplier Device Package=8-SOIC, Supplier Part Number 1=296-35456-1-ND, Voltage - Supply, Single/Dual (±)="4.75 V ~ 15.5 V, ±2.38 V ~ 7.75 V", Amplifier Type="General Purpose", Category="Integrated Circuits (ICs)", ComponentLink1Description=http://www.ti.com/lit/ds/symlink/lpc662.pdf, ComponentLink1URL=http://www.ti.com/lit/ds/symlink/lpc662.pdf, Mounting Type="Surface Mount", Output Type=Rail-to-Rail, Packaging="Cut Tape (CT)", Part Status=Active, Pricing 1="1=2.98, 10=2.672, 100=2.1893, 500=1.86368, 1000=1.57178 (USD)", RoHS="RoHS Compliant", Slew Rate="0.11 V/µs", Stock 1=4976, Supplier 1=Digi-Key

## Via types
v1: diameter 1.27, hole 0.711, Top Layer to Bottom Layer, 15 vias
v2: diameter 0.75, hole 0.5, Top Layer to Bottom Layer, 7 vias

## Nets (pads, with @x,y where several pads share a name; then routed paths per layer and width w, separated by ;. In a path a pad name is that pad's centre, name@x,y a point inside that pad or via, vN(x,y) a via of type N, cw(c..) or ccw(c..) an arc to the next point about the centre after c; other vN are vias at no path point)
+3.3: C5.1 P14.20 U3.3 | length 52.3
  Top Layer w0.254: U3.3 v2(28.984,129.736)
  Bottom Layer w0.254: C5.1@28.951,128.803 28.968,128.82 28.968,130.395 32.552,133.979 33.937,133.979 38.595,138.637 38.595,148.234 42.278,151.917 42.278,171.486 43.417,172.624 P14.20@43.458,172.624
+5: C3.1 C4.1 C7.1 C12.1 P14.19 R3.2 R6.2 R11.2 R14.2 R15.2 R18.2 R19.2 R20.2 U1.3 U1.4 U2.1 U2.18 U3.7 U4.8 U5.7 U6.8 U7.7 | length 61
  Top Layer w0.254: v1(24.321,144.308) 25.047,143.582 U2.18 ; U1.3 U1.4 31.543,123.607 C3.1 30.618,119.772 v1(30.607,119.761) ; U3.7 31.395,129.238 33,129.238 v1(33.033,129.271) ; v1(33.559,134.891) 33.559,137.082 U2.1
  Bottom Layer w0.254: R14.2 R15.2 v1(11.176,172.278) ; R3.2 6.67,157.734 v1(25.146,157.734) ; R18.2 R19.2 v1(19.812,127.58) ; C7.1@25.616,49.216 27.032,49.216 v1(27.064,49.185) 28.492,49.185 U6.8 ; C12.1 27.522,15.124 v1(27.572,15.174) 28.947,15.174 U4.8 ; v1(33.033,129.271) 35.078,129.271 C4.1
+12: DS1.1 DS2.1 DS3.1 DS4.1 DS5.1 DS6.1 P14.21 P14.22 P18.2 P19.2 P20.2 P22.2 P23.2 P24.2 | length 126
  Top Layer w0.254: 60.309,144.227 P19.2
  Top Layer w0.5: P14.22@45.998,172.624 46.088,172.534 P14.21 46.088,169.454 49.851,165.691 61.722,165.691 65.024,162.389 65.024,160.186 ; DS4.1@55.533,161.473 58.066,161.473 60.428,159.111 P20.2 63.949,159.111 65.024,160.186 ; DS2.1@55.552,137.826 59.272,137.826 60.602,136.496 64.024,136.496 65.024,137.497 ; DS3.1 58.597,153.962 60.459,152.101 63.963,152.101 64.977,153.115 ; DS5.1 59.218,129.832 P23.2 65.042,127.836 65.042,124.509 P24.2 ; DS1.1@55.626,145.862 58.674,145.862 60.309,144.227 ; DS6.1@56.114,121.344 59.926,121.344 60.366,120.904 P24.2@61.214,120.904 ; P19.2 64.217,144.227 65.024,145.034 ; 65.024,127.825 65.024,137.497 ; 65.024,137.497 65.024,145.034 ; 65.024,145.034 65.024,160.186
-5: P14.3
"ADC REF": C2.1 U1.5 U1.6 U3.6 | length 4.7
  Top Layer w0.254: U3.6 31.393,126.736 U1.6 31.543,125.694 31.601,125.636 33.068,125.636 C2.1@33.126,125.578
Analog_Mux_Out: U2.28 U3.5 | length 11.5
  Top Layer w0.254: U3.5 26.1,128.736 25.26,129.576 25.26,135.283 27.059,137.082 U2.28 U2.28@27.909,137.082
"Arrestment Heater FET": P14.16 R9.1 | length 19.1
  Top Layer w0.254: P14.16@38.378,172.624 38.6,172.624 39.738,171.486 39.738,169.821 47.673,161.886 R9.1
"Arrestment Htr Out": P20.1 Q3.2 R8.1 | length 9.4
  Top Layer w0.254: Q3.2 R8.1@55.099,156.772 ; R8.1@55.099,156.772 56.95,156.772 57.995,157.817 P20.1@61.037,157.817
"Arrestment Htr_LED": DS4.2 R8.2 | length 1.1
  Top Layer w0.254: R8.2@55.533,158.579 DS4.2@55.533,159.728
"Arrestment Thermistor": C16.1 R51.2 U2.20 | length 29
  Top Layer w0.254: R51.2@15.494,157.85 15.494,143.839 17.051,142.282 U2.20 ; R51.2 17.73,157.8 C16.1
"Board1 Heater FET": P14.17 R16.1 | length 50.9
  Top Layer w0.254: v1(42.418,129.54) 42.506,129.628 R16.1
  Signal Layer 1 w0.254: P14.17@40.918,170.084 41.008,169.994 41.23,169.994 42.319,168.905 v1@42.319,129.54
"Board1 Htr Out": P23.1 Q5.2 R12.1 | length 9.7
  Top Layer w0.254: Q5.2 R12.1 59.762,125.134 P23.1
"Board1 Thermistor": C19.1 R54.2 U2.25 | length 25.3
  Top Layer w0.254: C19.1 R54.2@11.126,127.486 ; R54.2 11.176,131.064 19.144,139.032 U2.25@27.434,139.032
"Board1_Htr LED": DS5.2 R12.2 | length 1.4
  Top Layer w0.254: R12.2 DS5.2
"Board2 Heater FET": P14.18 R17.1 | length 65.6
  Top Layer w0.254: v1(39.624,120.948) 51.773,120.948 R17.1
  Signal Layer 1 w0.254: v1@39.266,120.948 v1(39.624,120.948) ; v1@39.37,120.65 39.624,120.904 v1(39.624,120.948) ; P14.18@40.918,172.624 40.877,172.624 39.738,171.486 39.738,121.062 v1(39.624,120.948)
"Board2 Htr Out": P24.1 Q6.2 R13.1 | length 9.9
  Top Layer w0.254: Q6.2 R13.1 R13.1@55.831,116.694 ; 56.339,116.694 59.279,119.634 P24.1@61.214,119.634
"Board2 Thermistor": C20.1 R55.2 U2.26 | length 18.6
  Top Layer w0.254: C20.1 R55.2@17.202,127.53 ; R55.2 17.252,129.66 25.974,138.382 U2.26 U2.26@27.909,138.382
"Board2_Htr LED": DS6.2 R13.2 | length 1.4
  Top Layer w0.254: R13.2 DS6.2
"Conning Tower Heater FET": P14.14 R4.1 | length 38.9
  Top Layer w0.254: P14.14@35.838,172.624 36.06,172.624 37.291,171.393 37.291,150.719 37.34,150.671 37.846,150.165 42.635,145.376 51.308,145.376
"Conning Tower Htr Out": P19.1 Q1.2 R1.1 | length 9.7
  Top Layer w0.254: Q1.2 57.531,141.098 59.409,142.977 P19.1
"Conning Tower Htr_LED": DS1.2 R1.2 | length 1.4
  Top Layer w0.254: R1.2@55.626,142.731 DS1.2
"Conning Tower Thermistor": C14.1 R49.2 U2.22 | length 34.6
  Top Layer w0.254: R49.2 8.586,157.8 C14.1 8.636,147.078 14.732,140.982 U2.22 U2.22@27.909,140.982
"CROSS NEUTRAL": P1.2 U7.25 | length 21.5
  Top Layer w0.254: U7.25 U7.25@21.418,67.034
  Signal Layer 1 w0.254: P1.2 19.832,73.132 21.418,71.546 U7.25
Cross_Raw: R45.1 TP5.1 U7.19 | length 9.7
  Bottom Layer w0.254: R45.1 36.658,63.411 U7.19 36.703,66.429 TP5.1
"Gearbox Heater FET": P14.15 R10.1 | length 26.1
  Top Layer w0.254: P14.15@38.378,170.084 38.468,169.994 38.468,159.258 43.714,154.012 R10.1@51.562,154.012
"Gearbox Htr Out": P18.1 Q4.2 R7.1 | length 9.5
  Top Layer w0.254: Q4.2 54.627,149.352 54.667,149.312 57.618,149.312 59.157,150.851 P18.1
"Gearbox Htr_LED": DS3.2 R7.2 | length 1.4
  Top Layer w0.254: R7.2@55.552,151.13 DS3.2@55.552,152.48
"Gearbox Thermistor": C15.1 R50.2 U2.21 | length 30.9
  Top Layer w0.254: R50.2 13.158,157.8 C15.1 13.208,144.945 16.521,141.632 U2.21
GND: C1.1 C2.2 C3.2 C4.2 C5.2 C7.2 C10.2 C12.2 C13.2 C14.2 C15.2 C16.2 C17.2 C18.2 C19.2 C20.2 C21.2 C22.2 C23.2 P3.1 P3.3 P14.1 P14.2 P14.23 P14.24 P16.1 P17.1 P21.1 P25.1 P26.1 P27.1 Q1.3 Q2.3 Q3.3 Q5.3 R33.1 R47.1 U1.2 U2.12 U2.27 U3.2 U3.4 U3.8 U4.4 U5.22 U6.4 U7.22
"Lid Thermistor": C21.1 R56.2 U2.19 | length 23
  Top Layer w0.254: C21.1 22.556,157.8 R56.2 20.32,145.796 23.184,142.932 U2.19
"LONG NEUTRAL": P2.2 U5.25 | length 17.3
  Signal Layer 1 w0.254: P2.2 17.905,36.048 21.293,32.659 U5.25
Long_Raw: R28.1 TP1.1 U5.19 | length 8.7
  Bottom Layer w0.254: R28.1@36.533,28.234 U5.19 37.973,33.449 TP1.1
"Meter Heater FET": P14.13 R5.1 | length 44.3
  Top Layer w0.254: P14.13@35.838,170.084 35.928,169.994 35.928,145.376 44.056,137.248 R5.1
"Meter Thermistor 1": C17.1 R52.2 U2.24 | length 58.1
  Top Layer w0.254: C17.1@4.014,172.278 R52.2 1.778,144.64 6.736,139.682 U2.24 U2.24@27.909,139.682
"Meter Thermistor 2": C18.1 R53.2 U2.23 | length 55.1
  Top Layer w0.254: C18.1@8.536,172.278 R53.2 6.37,168.93 4.572,167.132 4.572,145.532 9.772,140.332 U2.23 U2.23@27.909,140.332
Meter_Htr_LED: DS2.2 R2.2 | length 1.8
  Top Layer w0.254: R2.2 DS2.2@55.552,136.226
METER_HTR_OUT: P22.1 Q2.2 R2.1 | length 10
  Top Layer w0.254: Q2.2 R2.1@55.487,132.842 ; R2.1 55.777,132.776 58.155,135.153 P22.1
"MUX A2": P14.7 U2.15 | length 24.8
  Top Layer w0.254: U2.15 27.908,145.532 27.953,145.576 v2(27.953,146.67)
  Signal Layer 1 w0.254: v2(27.953,146.67) 28.048,146.765 28.048,169.913 P14.7@28.218,170.084
"MUX A3": P14.11 U2.14 | length 24.8
  Top Layer w0.254: P14.11@33.298,170.084 33.388,169.994 33.388,145.576 33.433,145.532 33.559,145.532 U2.14
MUX_A0: P14.8 U2.17 | length 30.7
  Top Layer w0.254: U2.17@27.91,144.232 v2(29.553,144.231)
  Signal Layer 1 w0.254: P14.8@28.218,172.624 28.44,172.624 29.553,171.511 v2(29.553,144.231)
MUX_A1: P14.6 U2.16 | length 30.6
  Top Layer w0.254: v2(26.073,144.968) 26.141,144.9 27.891,144.9 U2.16@27.909,144.882
  Signal Layer 1 w0.254: P14.6@25.678,172.624 25.9,172.624 27.038,171.486 27.038,148.704 26.073,147.739 v2(26.073,144.968)
NetC1_2: C1.2 U1.1 | length 2.4
  Top Layer w0.254: C1.2@26.67,126.122 27.178,126.63 28.75,126.63 U1.1
NetC6_1: C6.1 U5.28 | length 3.5
  Bottom Layer w0.254: U5.28 13.673,29.115 C6.1
NetC6_2: C6.2 P2.1 U5.27 | length 14.9
  Signal Layer 1 w0.254: P2.1 14.075,34.798 16.213,32.659 U5.27
  Bottom Layer w0.254: C6.2@15.748,28.984 16.002,29.238 16.002,31.148 16.213,31.359 U5.27
NetC8_1: C8.1 U5.21 | length 3.1
  Bottom Layer w0.254: U5.21 31.453,29.115 C8.1
NetC8_2: C8.2 U5.20 | length 3.3
  Bottom Layer w0.254: C8.2 33.86,29.404 33.86,31.876 U5.20
NetC9_1: C9.1 U7.21 | length 3.7
  Bottom Layer w0.254: C9.1@31.578,63.534 C9.1 31.866,66.097 U7.21
NetC9_2: C9.2 U7.20 | length 3.3
  Bottom Layer w0.254: C9.2 34.114,63.694 34.114,66.38 U7.20
NetC11_1: C11.1 U7.28 | length 2.9
  Bottom Layer w0.254: U7.28 13.798,63.871 C11.1
NetC11_2: C11.2 P1.1 U7.27 | length 17.9
  Signal Layer 1 w0.254: P1.1 15.068,71.882 16.338,70.612 U7.27
  Bottom Layer w0.254: C11.2@15.386,63.583 15.386,64.782 16.338,65.734 U7.27
NetC22_1: C22.1 R57.1 TP2.1 U2.10 | length 144
  Top Layer w0.254: TP2.1 5.726,26.554 C22.1 26.847,26.604 R57.1@29.186,26.604 ; R57.1@29.186,26.416 R57.1@29.186,26.604 ; R57.1 R57.1@29.186,26.604 ; U2.10 34.982,142.932 35.064,142.85 35.064,120.154 30.023,115.113 30.023,43.256 30.251,43.028 30.251,29.54 29.186,28.475 R57.1@29.186,26.604
NetC23_1: C23.1 R58.1 TP6.1 U2.11 | length 114.8
  Top Layer w0.254: TP6.1 5.624,60.819 C23.1 ; C23.1@25.171,60.63 R58.1@27.762,60.63 ; R58.1 27.686,115.57 23.622,119.634 23.622,127.254 24.13,127.762 28.702,127.762 29.718,128.778 29.718,141.986 31.314,143.582 U2.11
NetP1_3: P1.3 U7.24 | length 24.2
  Signal Layer 1 w0.254: P1.3 21.479,74.382 23.979,71.882 23.979,66.405 U7.24
NetP2_3: P2.3 U5.24 | length 20.3
  Signal Layer 1 w0.254: P2.3 19.195,37.298 23.833,32.659 U5.24
NetP3_2: P3.2 R15.1 R53.1 | length 6.7
  Top Layer w0.254: R53.1 P3.2
  Bottom Layer w0.254: R15.1@6.37,174.198 P3.2
NetP3_4: P3.4 R14.1 R52.1 | length 9.7
  Top Layer w0.254: R52.1 1.778,176.53 2.794,177.546 P3.4
  Bottom Layer w0.254: R14.1 1.778,176.53 2.794,177.546 P3.4
NetP16_2: P16.2 R3.1 R49.1 | length 7.4
  Top Layer w0.254: R49.1 6.598,162.28 P16.2
  Bottom Layer w0.254: R3.1 6.604,162.306 7.366,163.068 P16.2
NetP17_2: P17.2 R6.1 R50.1 | length 7.5
  Top Layer w0.254: R50.1 11.176,162.286 P17.2
  Bottom Layer w0.254: R6.1 11.176,162.286 P17.2 P17.2@11.958,162.988
NetP21_2: P21.2 R11.1 R51.1 | length 7.4
  Top Layer w0.254: R51.1 15.748,162.286 P21.2
  Bottom Layer w0.254: R11.1 15.748,162.286 P21.2
NetP25_2: P25.2 R18.1 R54.1 | length 6.2
  Top Layer w0.254: P25.2@11.176,122.582 R54.1
  Bottom Layer w0.254: P25.2@11.176,122.582 R18.1
NetP26_2: P26.2 R19.1 R55.1 | length 6.5
  Top Layer w0.254: P26.2 R55.1
  Bottom Layer w0.254: P26.2 R19.1
NetP27_2: P27.2 R20.1 R56.1 | length 5.6
  Top Layer w0.254: R56.1 20.32,161.544 21.102,162.326 P27.2
  Bottom Layer w0.254: 20.32,161.524 21.102,162.306 P27.2
NetQ1_1: Q1.1 R4.2 | length 2.1
  Top Layer w0.254: Q1.1 R4.2
NetQ2_1: Q2.1 R5.2 | length 2.2
  Top Layer w0.254: Q2.1@52.07,133.343 R5.2
NetQ3_1: Q3.1 R9.2 | length 2.9
  Top Layer w0.254: Q3.1 R9.2
NetQ4_1: Q4.1 R10.2 | length 2.5
  Top Layer w0.254: Q4.1 R10.2
NetQ5_1: Q5.1 R16.2 | length 2.3
  Top Layer w0.254: Q5.1 R16.2
NetQ6_1: Q6.1 R17.2 | length 2.4
  Top Layer w0.254: Q6.1@52.071,117.195 R17.2
NetR22_1: R22.1 R28.2 U4.6 | length 16.8
  Bottom Layer w0.254: R22.1 31.623,12.328 U4.6 31.623,17.653 36.015,22.045 36.015,26.548 36.313,26.846 R28.2
NetR22_2: R22.2 TP3.1 U4.3 U4.7 | length 33.9
  Bottom Layer w0.254: TP3.1 30.318,18.923 30.572,18.669 ; R22.2 30.271,12.576 30.271,14.955 U4.7 30.353,18.451 30.572,18.669 ; U4.3 31.623,20.188 30.889,19.454 30.889,18.987 30.572,18.669
NetR23_1: R23.1 R24.1 U5.2 | length 5.4
  Bottom Layer w0.254: R23.1@15.648,9.984 16.298,9.984 ; U5.2@16.213,5.959 16.298,6.044 16.298,9.984 ; R24.1@16.948,9.984 16.298,9.984
NetR23_2: R23.2 U5.1 | length 3.6
  Bottom Layer w0.254: U5.1 13.882,6.818 R23.2 R23.2@13.879,10.157
NetR24_2: R24.2 U5.3 | length 3.4
  Bottom Layer w0.254: R24.2@18.648,9.984 18.753,9.879 U5.3
NetR26_1: R26.1 U5.6 | length 3.4
  Bottom Layer w0.254: R26.1@25.485,3.564 26.373,4.452 U5.6
NetR26_2: R26.2 U5.5 | length 3.1
  Bottom Layer w0.254: R26.2 23.833,3.601 U5.5
NetR29_1: R29.1 R33.2 U4.5 | length 3.8
  Bottom Layer w0.254: U4.5 32.972,15.116 34.995,15.116 R29.1 35.306,15.427 R33.2
NetR30_1: R30.1 R32.1 U5.11 | length 4.4
  Bottom Layer w0.254: R30.1@38.442,9.398 39.073,9.398 ; U5.11 39.073,9.398 ; R32.1 39.073,9.398
NetR30_2: R30.2 U5.10 | length 3.1
  Bottom Layer w0.254: U5.10 R30.2@36.533,9.668
NetR32_2: R32.2 U5.12 | length 2.9
  Bottom Layer w0.254: U5.12 R32.2@41.613,9.492
NetR36_1: R36.1 R37.1 U7.2 | length 4.6
  Bottom Layer w0.254: R36.1 16.383,43.942 ; U7.2 16.338,43.897 16.383,43.942 ; R37.1 16.383,43.942
NetR36_2: R36.2 U7.1 | length 3.1
  Bottom Layer w0.254: R36.2@13.74,43.8 R36.2@13.798,43.858 ; U7.1 13.882,41.068 R36.2
NetR37_2: R37.2 U7.3 | length 3.1
  Bottom Layer w0.254: R37.2@18.648,43.984 18.878,43.754 U7.3
NetR38_1: R38.1 R45.2 U6.6 | length 18.4
  Bottom Layer w0.254: R38.1 31.052,46.402 U6.6 31.052,52.071 36.576,57.596 R45.2 36.351,61.634 R45.2@36.053,61.336
NetR38_2: R38.2 TP7.1 U6.3 U6.7 | length 33.9
  Top Layer w0.254: TP7.1 5.588,53.111 v1(24.536,53.111)
  Bottom Layer w0.254: v1@24.244,53.122 24.282,53.084 29.782,53.084 ; R38.2 29.782,46.504 U6.7 29.782,53.084 ; U6.3 31.052,54.354 29.782,53.084
NetR40_1: R40.1 U7.6 | length 3.8
  Bottom Layer w0.254: R40.1 26.498,38.856 U7.6 U7.6@26.498,40.334
NetR40_2: R40.2 U7.5 | length 2.9
  Bottom Layer w0.254: U7.5 23.958,38.184 R40.2
NetR42_1: R42.1 R44.1 U7.11 | length 4.2
  Bottom Layer w0.254: R42.1@38.556,43.688 39.198,43.688 ; U7.11 39.198,43.688 ; R44.1 39.978,43.688 39.198,43.688
NetR42_2: R42.2 U7.10 | length 2.7
  Bottom Layer w0.254: U7.10 R42.2@36.658,43.688
NetR44_2: R44.2 U7.12 | length 2.8
  Bottom Layer w0.254: U7.12 R44.2@41.738,43.754
NetR46_1: R46.1 R47.2 U6.5 | length 4
  Bottom Layer w0.254: U6.5 32.447,49.33 34.487,49.33 R46.1 R47.2@34.785,50.951
NetR57_2: R57.2 U4.1 U4.2 | length 5.3
  Top Layer w0.254: v1(29.21,22.987) R57.2
  Bottom Layer w0.254: v1(29.21,22.987) 29.083,22.86 U4.1 U4.2
NetR58_2: R58.2 U6.1 U6.2 | length 5.8
  Top Layer w0.254: R58.2 28.448,58.232 v1(28.448,56.896)
  Bottom Layer w0.254: v1(28.448,56.896) 28.448,54.918 U6.1 U6.2